# Altium PCB PCB2.PcbDoc (part 1 of 3)
Units mm, origin at the board's own origin, x right, y up, seen from the top; angles counter-clockwise.
Board outline 89.15 x 51.05 mm, 2 copper layers (Top Layer, Bottom Layer); 28 components, 20 nets, 117 pads, 27 vias.
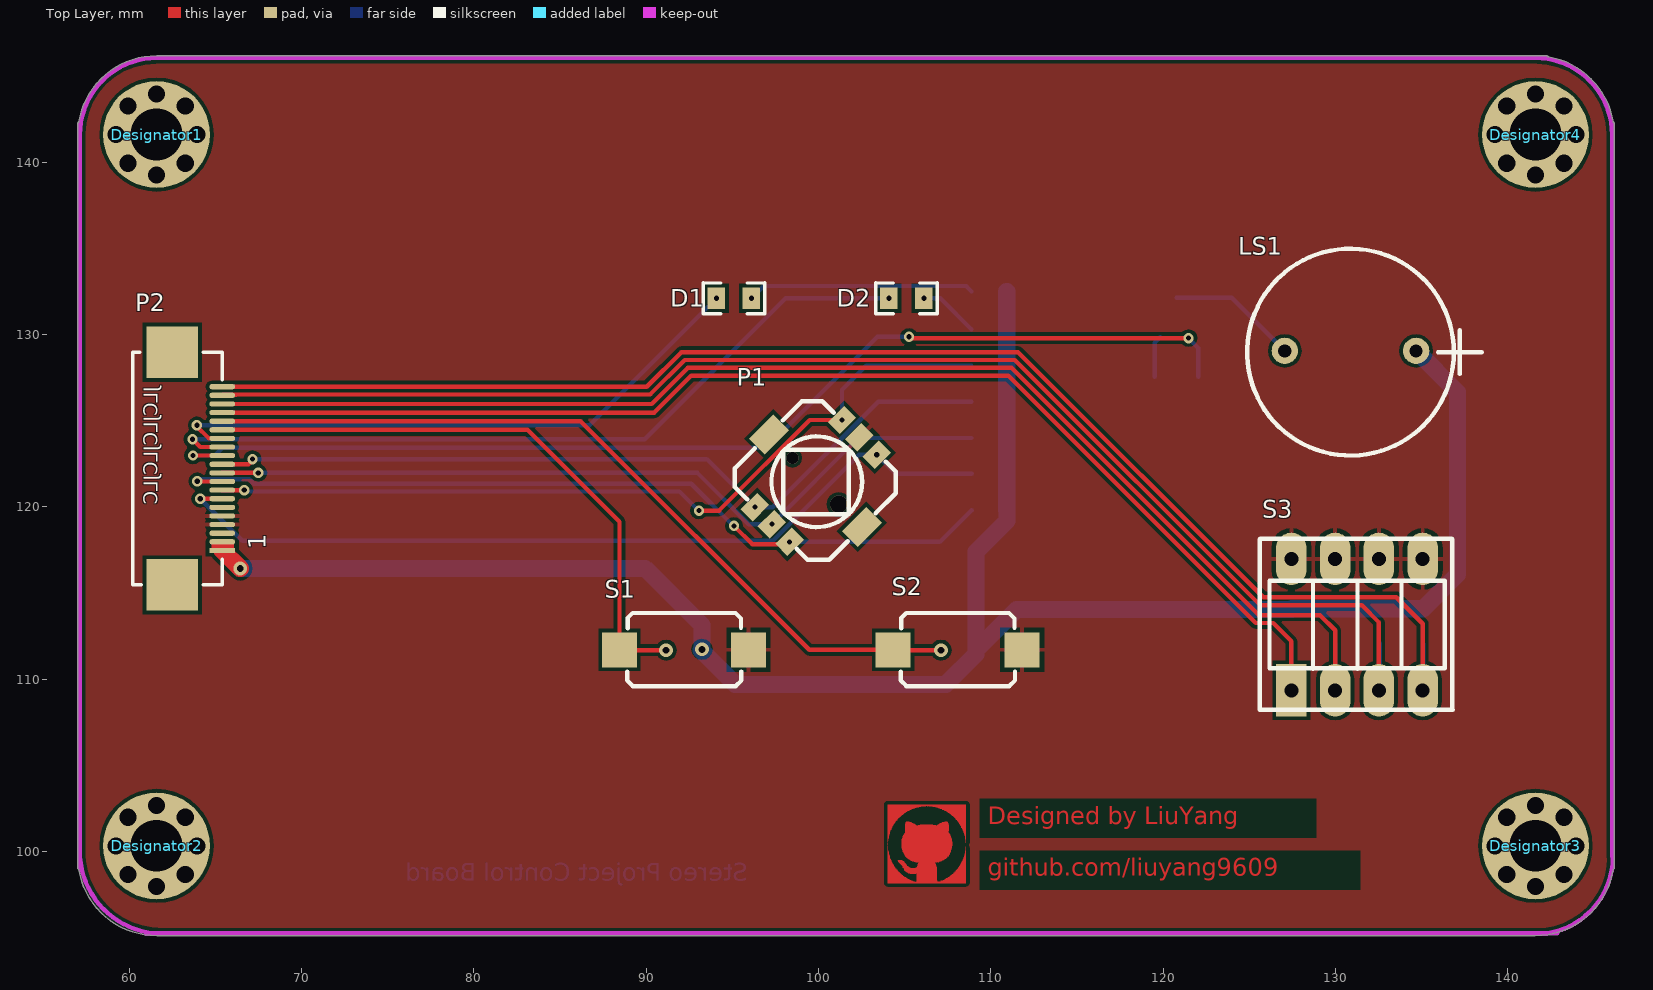
[diagram p0: Top Layer view]
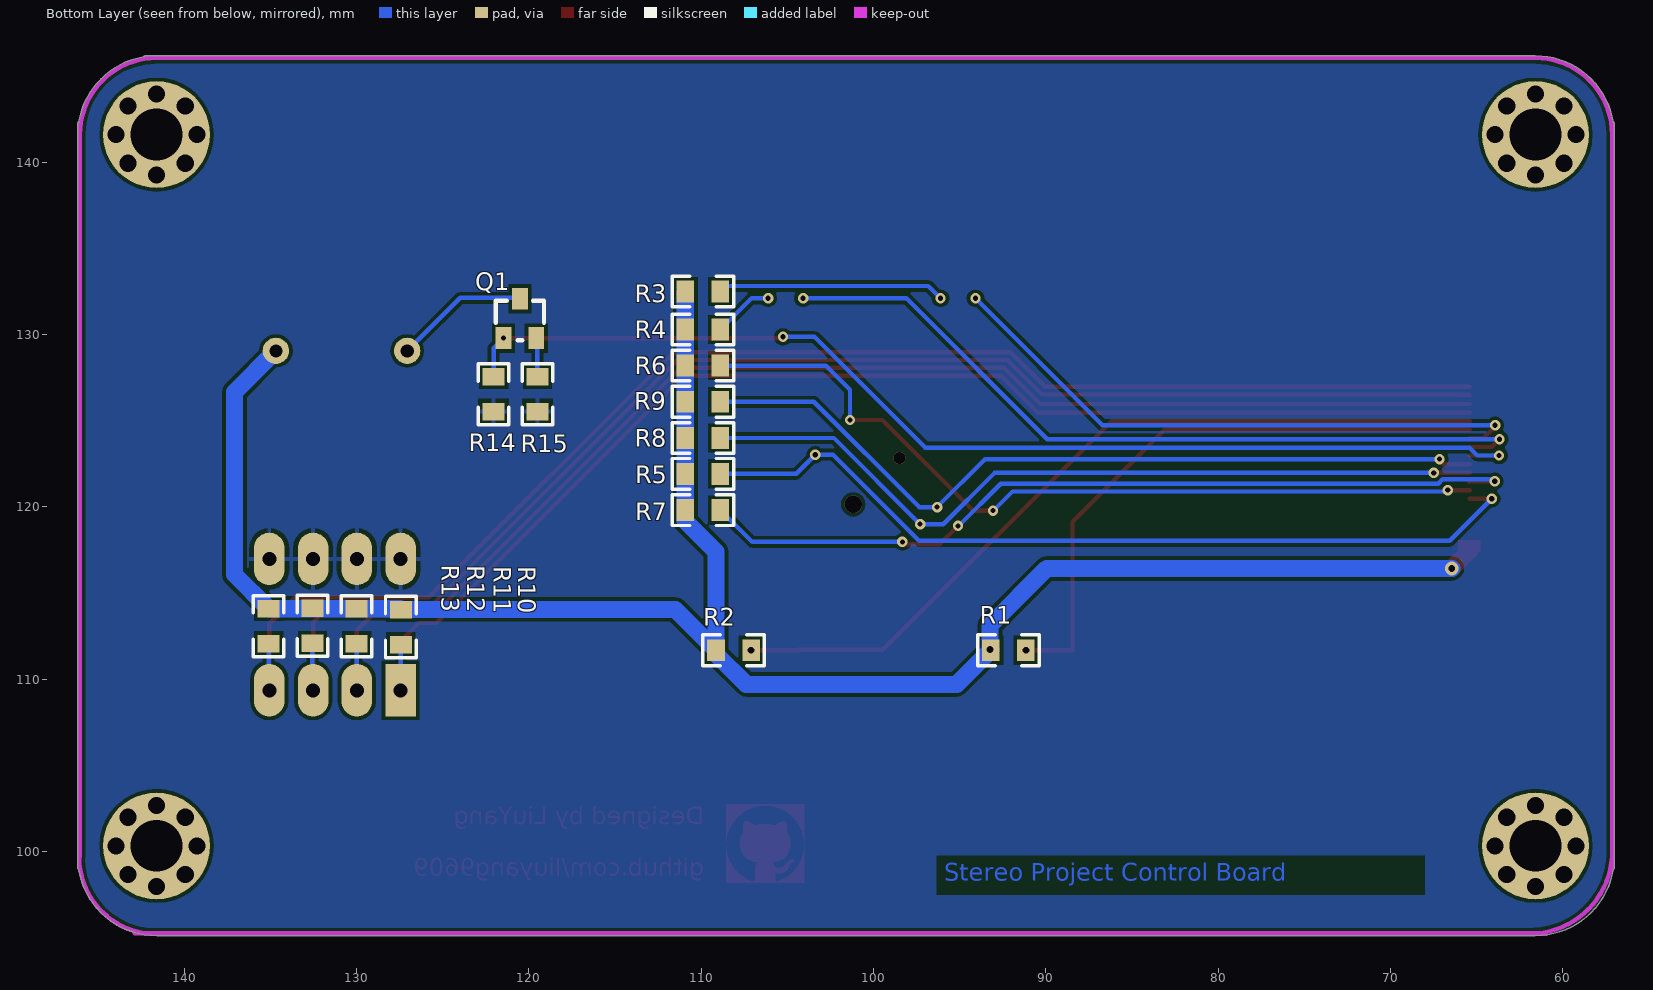
[diagram p1: Bottom Layer view, seen from below]
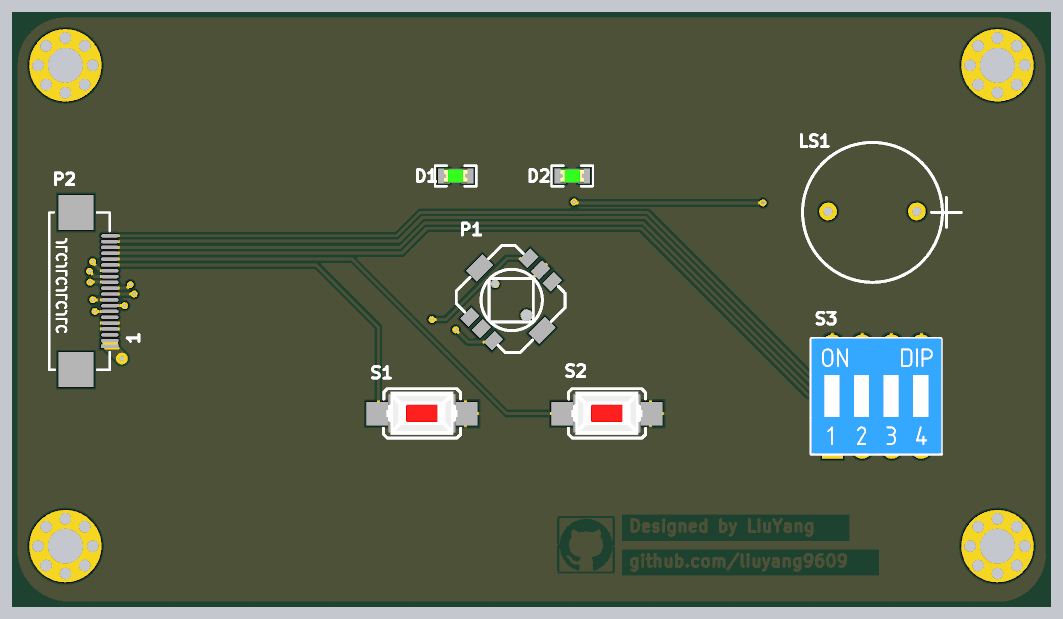
[diagram p4: 3D render of the assembled board from above, using the file's embedded part models]
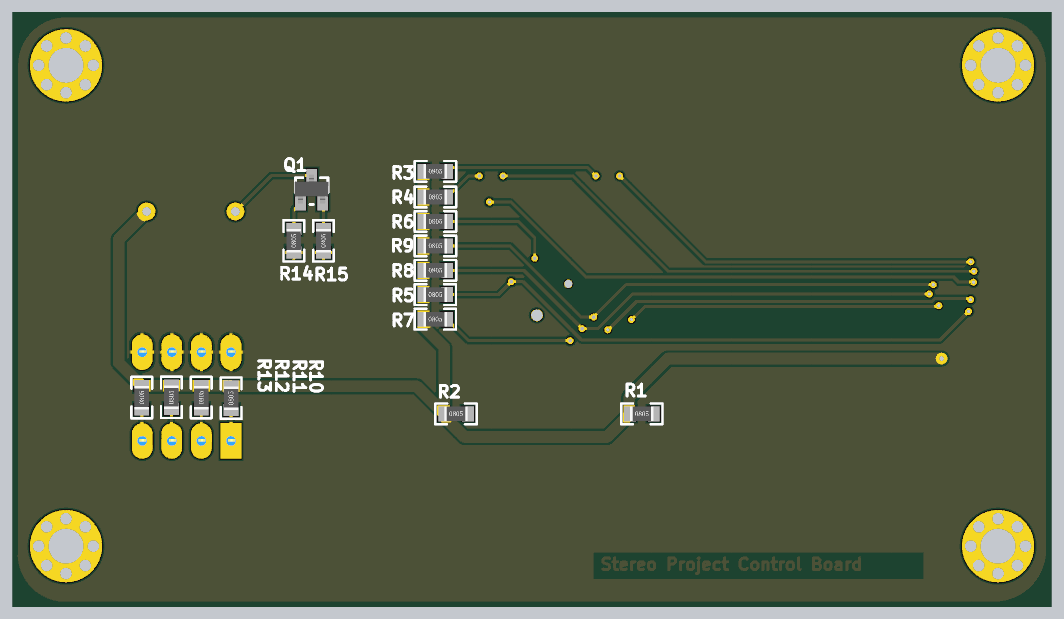
[diagram p5: 3D render of the assembled board from below, using the file's embedded part models]

## Layer stack, top to bottom
Top Solder: solder mask 0.0102, Solder Resist, Dk 3.5
Top Layer: signal copper 0.0356
Dielectric 1: dielectric 0.32, FR-4, Dk 4.8
Bottom Layer: signal copper 0.0356
Bottom Solder: solder mask 0.0102, Solder Resist, Dk 3.5

## Board outline
57.023,99.06 57.023,142.24 cw(c57.15,142.24) 57.083,142.349 cw(c61.595,141.605) 61.595,146.177 142.24,146.177 cw(c142.24,146.05) 142.349,146.117 cw(c141.605,141.605) 146.117,142.349 cw(c146.05,142.24) 146.177,142.24 146.177,99.06 cw(c146.05,99.06) 146.117,98.951 cw(c141.605,99.695) 141.605,95.123 61.595,95.123 cw(c61.595,99.695) 57.083,98.951 cw(c57.15,99.06)

## Design rules (kind name [scope] priority, off if disabled: settings)
Clearance [All] p1: gap=0.2
PolygonConnect [All] p1: connectstyle=Relief reliefconductorwidth=0.254 reliefentries=4 polygonreliefangle="90 Angle" airgapwidth=0.254
RoutingVias [All] p1: holewidth=0.3 width=0.6 viastyle="Through Hole" minholewidth=0.3 minwidth=0.6 maxholewidth=100 maxwidth=100
SolderMaskExpansion [All] p1: expansion=0.102
Width [All] p1: maxlimit=1.27 minlimit=0.127 preferedwidth=0.254
30 further rules are at their usual default settings.

## Classes and differential pairs
component class Sheet2: D1 D2 LS1 P1 P2 Q1 R1 R2 R3 R4 R5 R6 R7 R8 R9 R10 R11 R12 R13 R14 R15 S1 S2 S3

## Components (designator, comment, footprint, x,y, rotation, side; value= is the part's Value field where it differs from the comment)
D1 "LED" LED0805绿 95.098,132.105 r180 top
D2 "LED" LED0805绿 105.105,132.105 r180 top
Designator1 "Comment" 定位孔 61.595,141.605 r0 top
Designator2 "Comment" 定位孔 61.595,100.33 r0 top
Designator3 "Comment" 定位孔 141.605,100.33 r0 top
Designator4 "Comment" 定位孔 141.605,141.605 r0 top
LS1 "Beep" 蜂鸣器 129.565,128.702 r90 top
P1 "KEY" 贴片5向按键 97.3,119 r45 top
P2 "Header 22" FPC20Pin 65.405,117.475 r180 top
Q1 "2N3904" SOT23 120.523,130.937 r180 bottom
R1 "Res1" R0805 92.177,111.684 r180 bottom
R2 "Res1" R0805 108.128,111.684 r180 bottom
R3 "Res1" R0805 109.9,132.5 r180 bottom
R4 "Res1" R0805 109.9,130.3 r180 bottom
R5 "Res1" R0805 109.906,121.92 r180 bottom
R6 "Res1" R0805 109.9,128.2 r180 bottom
R7 "Res1" R0805 109.906,119.812 r180 bottom
R8 "Res1" R0805 109.9,124 r180 bottom
R9 "Res1" R0805 109.9,126.1 r180 bottom
R10 "Res1" R0805 127.432,113.03 r90 bottom
R11 "Res1" R0805 129.997,113.081 r90 bottom
R12 "Res1" R0805 132.563,113.106 r90 bottom
R13 "Res1" R0805 135.103,113.081 r90 bottom
R14 "Res1" R0805 122.047,126.543 r90 bottom
R15 "Res1" R0805 119.507,126.543 r90 bottom
S1 "SW-PB" 贴片按键 92.202,111.709 r180 top
S2 "SW-PB" 贴片按键 108.077,111.709 r180 top
S3 "SW-DIP4" 拨码开关4 130.708,113.741 r90 top

## Footprints (in the part's own frame and the unit in brackets; to place one, negate y for a bottom-side part, rotate by r counter-clockwise, add the part's x,y. Pads: shape width x height; smd on the part's side, far side on the other; paste and mask are expansions set on the pad)
FPC20Pin [mm]
  rect 1.5x0.3 smd: 1(0,0)
  oval 1.5x0.3 smd: 2(0,-0.5) 3(0,-1) 4(0,-1.5) 5(0,-2) 6(0,-2.5) 7(0,-3) 8(0,-3.5) 9(0,-4) 10(0,-4.5) 11(0,-5) 12(0,-5.5) 13(0,-6) 14(0,-6.5) 15(0,-7) 16(0,-7.5) 17(0,-8) 18(0,-8.5) 19(0,-9) 20(0,-9.5)
  rect 3x3 smd: 21(2.9,2) 22(2.9,-11.5)
  silkscreen extent 0,-11.5 5.2,2
LED0805绿 [mil]
  rect 40x50 smd: 1(-40,0) 2(40,0)
  silkscreen extent -70,-35 70,35, body extent -40,-25 40,24, height 43
R0805 [mil]
  rect 40x50 smd: 1(-40,0) 2(40,0)
  silkscreen extent -70,-35 70,35, body extent -39,-25 39,25, height 22
SOT23 [mil]
  rect 36x50 smd: B(-37.5,-45) C(0,45) E(37.5,-45)
  silkscreen extent -55,-50 55,40, body extent -57,-47 57,50, height 39
定位孔 [mm]
  round 1 hole 1: 1(-2.35,0) 1(-1.662,-1.662) 1(-1.662,1.662) 1(0,-2.35) 1(0,2.35) 1(1.662,-1.662) 1(1.662,1.662) 1(2.35,0)
  round 6.2 hole 3: 1(0,0)
拨码开关4 [mil]
  rect 120x70 hole 32: 1(-172.5,128.5)
  oval 120x70 hole 32: 2(-172.5,28.5) 3(-172.5,-71.5) 4(-172.5,-171.5) 5(127.5,-171.5) 6(127.5,-71.5) 7(127.5,28.5) 8(127.5,128.5)
  silkscreen extent -217,-240 174,200, body extent -215,-239 175,200, height 276
蜂鸣器 [mil]
  round 60 hole 30: 1(14,-201.5) 2(14,98.5)
  silkscreen extent -225,-352 247,185, body extent -223,-290 249,183, height 299
贴片5向按键 [mm]
  rect 1.35x1 smd: 1(0,1.397) 2(0,0) 3(0,-1.453) 4(7.15,1.397) 5(7.15,-0.028) 6(7.15,-1.453)
  rect 2x1.3 smd: 7(3.575,3.8) 8(3.575,-3.8)
  silkscreen extent 0,-3.81 7.24,3.81
贴片按键 [mil]
  rect 80x80 smd: 1(-147.5,0) 2(147.5,0)
  silkscreen extent -131,-84 130,83, body extent -120,-74 120,72, height 98

## Part data
D1 D2: library part LED0, "Typical INFRARED GaAs LED"
LS1: library part Buzzer, "Magnetic Transducer Buzzer"
P1: library part "Header 4X2", "Header, 4-Pin, Dual row"
P2: "Header, 22-Pin"
Q1: "NPN General Purpose Amplifier"
R1 R2 R3 R4 R5 R6 R7 R8 R9 R10 R11 R12 R13 R14 R15: "Resistor"
S1 S2: "Switch"
S3: "DIP Switch"

## Via types
v1: diameter 0.6, hole 0.3, Top Layer to Bottom Layer, 21 vias
v2: diameter 0.8, hole 0.4, Top Layer to Bottom Layer, 4 vias
v3: diameter 0.7, hole 0.7, Top Layer to Bottom Layer, 1 vias
v4: diameter 1, hole 1, Top Layer to Bottom Layer, 1 vias

## Nets (pads, with @x,y where several pads share a name; then routed paths per layer and width w, separated by ;. In a path a pad name is that pad's centre, name@x,y a point inside that pad or via, vN(x,y) a via of type N, cw(c..) or ccw(c..) an arc to the next point about the centre after c; other vN are vias at no path point)
DGND: P1.5 P2.4 P2.5 R14.1 R15.1 S1.1 S2.1 S3.5 S3.6 S3.7 S3.8
N17: P2.15 R1.2 S1.2 | length 35.4
  Top Layer w0.254: P2.15@65.405,124.475 83.119,124.475 88.456,119.139 S1.2@88.456,111.709 88.481,111.684 v2(91.161,111.684)
N20: P1.6 P2.7 R5.2 | length 49.6
  Top Layer w0.254: v1(64.128,120.475) P2.7@65.405,120.475
  Bottom Layer w0.254: v1(64.128,120.475) 66.569,118.034 97.358,118.034 102.353,123.028 v1(103.383,123.028) 104.492,121.92 R5.2@108.89,121.92
NetD1_1: D1.1 R3.2 | length 13.2
  Bottom Layer w0.254: v1(96.114,132.105) 96.825,132.817 108.567,132.817 R3.2@108.884,132.5
NetD2_1: D2.1 R4.2 | length 3.5
  Bottom Layer w0.254: v1(106.121,132.105) 107.079,132.105 R4.2@108.884,130.3
NetLS1_2: LS1.2 Q1.C | length 7.6
  Bottom Layer w0.254: Q1.C@120.777,132.131 123.99,132.131 LS1.2@127.063,129.057
NetQ1_E: Q1.E R15.2 | length 2.4
  Bottom Layer w0.254: R15.2@119.507,127.559 119.507,129.527 Q1.E@119.825,129.845
P18: P2.16 R2.2 S2.2 | length 47.2
  Top Layer w0.254: P2.16@65.405,124.975 86.201,124.975 99.466,111.709 S2.2@104.331,111.709 104.356,111.684 v2(107.112,111.684)
P20: P1.4 P2.8 R6.2 | length 48.5
  Top Layer w0.254: P2.8@65.405,120.975 v1(66.682,120.975) ; v1(93.066,119.786) 94.234,119.786 99.491,125.044 v1(101.368,125.044)
  Bottom Layer w0.254: v1(66.682,120.975) 66.763,120.894 91.933,120.894 93.04,119.786 v1(93.066,119.786) ; v1(101.368,125.044) 101.368,126.793 102.775,128.2 R6.2@108.884,128.2
R18: P2.12 Q1.B R14.2 | length 64.8
  Top Layer w0.254: v1(63.703,122.987) 65.393,122.987 P2.12@65.405,122.975 ; v1(105.258,129.87) 105.334,129.794 v1(121.475,129.794)
  Bottom Layer w0.254: v1(63.703,122.987) 64.973,122.987 65.43,123.444 97.003,123.444 103.429,129.87 v1(105.258,129.87) ; v1(121.475,129.794) 122.047,129.222 R14.2@122.047,127.559
T17: P1.1 P2.11 R9.2 | length 47.3
  Top Layer w0.254: P2.11@65.405,122.475 66.925,122.475 67.183,122.733 67.183,122.747 v1(67.159,122.771)
  Bottom Layer w0.254: v1(67.159,122.771) 93.529,122.771 v1(96.312,119.988) 97.356,119.988 103.469,126.1 R9.2@108.884,126.1
T20: P1.3 P2.9 R7.2 | length 48.8
  Top Layer w0.254: v1(63.957,121.488) 63.97,121.475 P2.9@65.405,121.475 P2.9@65.428,121.452 ; v1(95.098,118.897) 96.153,117.842 98.197,117.842 v1(98.327,117.973)
  Bottom Layer w0.254: v1(63.957,121.488) 64.071,121.602 66.981,121.602 67.235,121.348 92.622,121.348 95.072,118.897 v1(95.098,118.897) ; v1(98.327,117.973) 107.051,117.973 R7.2@108.89,119.812
U20: P1.2 P2.10 R8.2 | length 46.8
  Top Layer w0.254: P2.10@65.405,121.975 v1(67.495,121.975)
  Bottom Layer w0.254: v1(67.495,121.975) 92.985,121.975 95.96,119 v1(97.3,119) 102.3,124 R8.2@108.884,124
V20: D2.2 P2.13 | length 45.7
  Top Layer w0.254: v1(63.678,123.927) 64.129,123.475 P2.13@65.405,123.475
  Bottom Layer w0.254: v1(63.678,123.927) 89.916,123.927 98.095,132.105 v1(104.089,132.105)
VCC_3V3: LS1.1 P2.1 P2.2 R1.1 R2.1 R3.1 R4.1 R5.1 R6.1 R7.1 R8.1 R9.1 R10.2 R11.2 R12.2 R13.2 | length 114
  Top Layer w1: P2.1@65.405,117.475 v2(66.446,116.434)
  Bottom Layer w1: v2(66.446,116.434) 89.941,116.434 93.243,113.132 v2(93.243,111.735) R1.1@93.193,111.684 95.174,109.703 107.391,109.703 109.144,111.455 R2.1@109.144,111.684 ; R3.1@110.916,132.5 110.922,132.494 R5.1@110.922,121.92 R7.1@110.922,119.812 ; R7.1@110.947,119.685 110.947,119.202 109.144,117.399 R2.1@109.144,111.684 ; LS1.1@134.683,129.057 137.084,126.657 137.084,116.078 R13.2@135.103,114.097 R11.2@129.997,114.097 127.483,114.097 R10.2@127.432,114.046 111.506,114.046 R2.1@109.144,111.684
W18: P2.17 R10.1 S3.1 | length 74.8
  Top Layer w0.254: P2.17@65.405,125.475 90.47,125.475 92.614,127.619 111.018,127.619 125.375,113.262 126.387,113.262 127.444,112.204 S3.1@127.444,109.36
  Bottom Layer w0.254: R10.1@127.432,112.014 127.432,109.372 S3.1@127.444,109.36
W19: P2.18 R11.1 S3.2 | length 77.9
  Top Layer w0.254: P2.18@65.405,125.975 90.327,125.975 92.426,128.073 111.206,128.073 125.563,113.716 129.108,113.716 129.984,112.84 S3.2@129.984,109.36
  Bottom Layer w0.254: S3.2@129.984,109.36 129.997,109.372 R11.1@129.997,112.065
W20: D1.2 P2.14 | length 35.1
  Top Layer w0.254: v1@63.906,124.739 v1(63.932,124.739) 63.932,124.674 64.63,123.975 P2.14@65.405,123.975
  Bottom Layer w0.254: v1(63.932,124.739) 86.716,124.739 v1(94.082,132.105)
Y18: P2.19 R12.1 S3.3 | length 81
  Top Layer w0.254: P2.19@65.405,126.475 65.428,126.498 66.226,126.498 66.226,126.521 90.231,126.521 92.238,128.527 111.394,128.527 125.618,114.303 131.521,114.303 132.524,113.3 S3.3@132.524,109.36
  Bottom Layer w0.254: S3.3@132.524,109.36 132.563,109.398 R12.1@132.563,112.09
Y19: P2.20 R13.1 S3.4 | length 83.6
  Top Layer w0.254: P2.20@65.405,126.975 90.043,126.975 92.05,128.981 111.582,128.981 125.806,114.757 133.528,114.757 135.064,113.221 S3.4@135.064,109.36
  Bottom Layer w0.254: S3.4@135.064,109.36 135.103,109.398 R13.1@135.103,112.065
pads on no net: Designator1.1 Designator2.1 Designator3.1 Designator4.1 P1.7 P1.8 P2.3 P2.6 P2.21 P2.22
copper on no net: | length 1323.4